# EAGLE board IO_adapter_display (EAGLE 7.7.0)
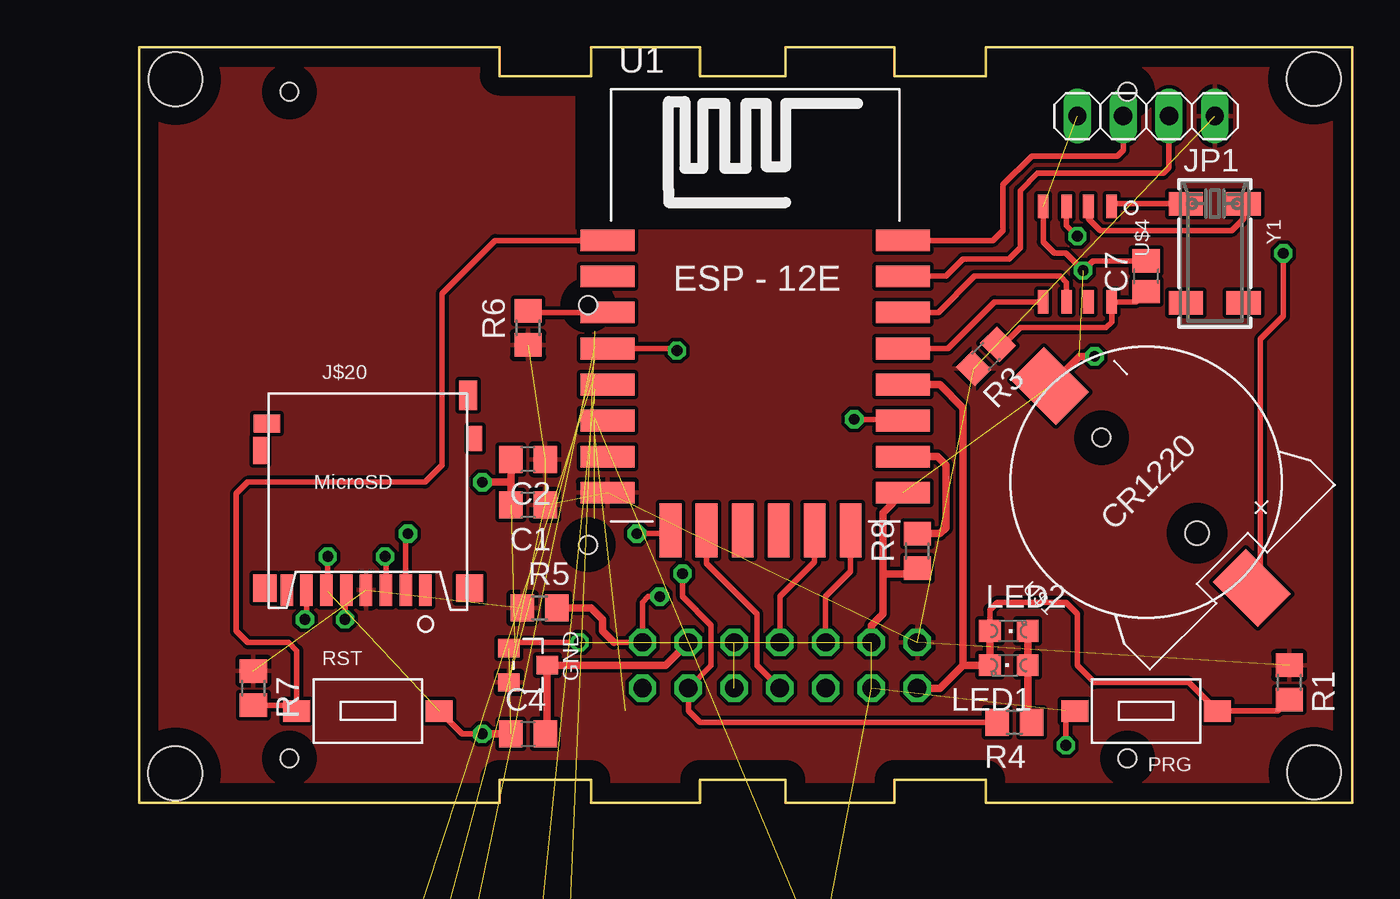
[diagram p0: board, top side]
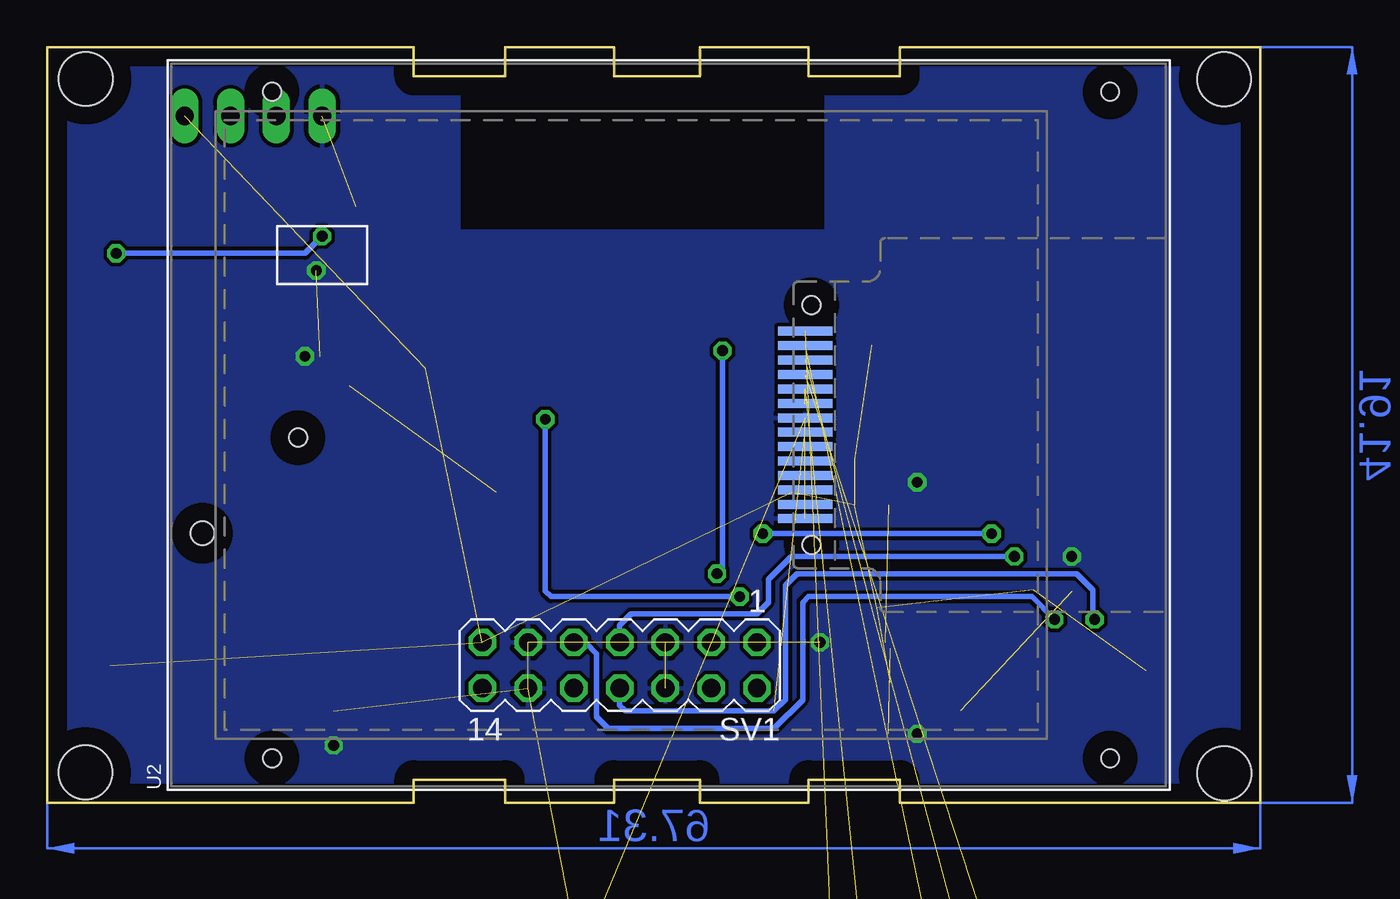
[diagram p1: board, bottom side, seen from below]

Size 67.31 x 41.91 mm. Coordinates in mm from the lower left corner, seen from the top.
Outline: 0,41.91 20,41.91 20,40.32 25.08,40.32 25.08,41.91 31.11,41.91 31.11,40.32 35.88,40.32 35.88,41.91 41.91,41.91 41.91,40.32 46.99,40.32 46.99,41.91 67.31,41.91 67.31,0 46.99,0 46.99,1.27 41.91,1.27 41.91,0 35.88,0 35.88,1.27 31.11,1.27 31.11,0 25.08,0 25.08,1.27 20,1.27 20,0 0,0 0,41.91
Copper layers (1*16): Top 0.035mm / dielectric 1.5mm / Bottom 0.035mm
Design rules "default": minimum track width 10mil, minimum drill 24mil, track to track 8mil, track to pad 8mil, pad to pad 8mil, via to via 8mil, smd to smd 8mil, copper to edge 40mil, drill to drill 8mil, minimum pad ring 10mil, minimum via ring 8mil, stop-mask expansion 4mil, vias tented up to drill 0mil, thermal gap 10mil
Holes 3 mm at 2.02,40.15 65.19,40.16 65.19,1.67 2,1.63

## Footprints (pad centres in the part's own frame; a part is rotated, then mirrored left to right if it is on the bottom)
C0805 = smd 1.3 x 1.5: 1 -0.95,0; 2 0.95,0
C0805' = smd 1.3 x 1.5: 1 -0.85,0; 2 0.85,0
SOT-23 = smd 1.016 x 1.2: 1 -0.95,-1.06; 2 0.95,-1.06; 3 0,1.06
MICROSD = smd 0.7 x 1.75: P$1 3.2,-0.9; P$2 2.1,-0.9; P$3 1,-0.9; P$4 -0.1,-0.9; P$5 -1.2,-0.9; P$6 -2.3,-0.9; P$7 -3.4,-0.9; P$8 -4.5,-0.9 | smd 1.3 x 1.5: P$9 -5.7,-0.8 | smd 1.5 x 1.5: P$10 5.65,-0.8 | smd 0.8 x 1.5: P$11 -5.95,6.85 | smd 0.8 x 1.4: P$13 5.95,7.5 | smd 1 x 1.65: P$CD1 5.55,9.9 | smd 1.45 x 1: P$CD2 -5.6,8.35
1X04 = drill 1.016 long: 1 -3.81,0; 2 -1.27,0; 3 1.27,0; 4 3.81,0
CHIPLED_0805 = smd 1.2 x 1.2: A 0,-1.05; C 0,1.05
TACT_6X3.5 = smd 1.5 x 1.2: P$1 -3.95,0; P$2 3.95,0
SOT23-WIDE = smd 1 x 1.2: 1 -0.95,-1; 2 0.95,-1; 3 0,1
R0805 = smd 1.3 x 1.5: 1 -0.95,0; 2 0.95,0
_0805MP = smd 1.2 x 1.3: 1 -1.016,0; 2 1.016,0
MA07-2 = drill 1.016 octagon: 1 -7.62,-1.27; 2 -7.62,1.27; 3 -5.08,-1.27; 4 -5.08,1.27; 5 -2.54,-1.27; 6 -2.54,1.27; 7 0,-1.27; 8 0,1.27; 9 2.54,-1.27; 10 2.54,1.27; 11 5.08,-1.27; 12 5.08,1.27; 13 7.62,-1.27; 14 7.62,1.27
ESP12E-SMD = smd 3 x 1.2: ADC -8.3,3.8; CH_PD -8.3,1.8; GND 8.1,-8.2; GPIO0 8.1,-2.2; GPIO2 8.1,-4.2; GPIO4 8.1,-0.2; GPIO5 8.1,1.8; GPIO12 -8.3,-4.2; GPIO13 -8.3,-6.2; GPIO14 -8.3,-2.2; GPIO15 8.1,-6.2; GPIO16 -8.3,-0.2; RESET -8.3,5.8; RXD0 8.1,3.8; TXD0 8.1,5.8; VCC -8.3,-8.2 | smd 1.2 x 3: CS0 -4.8,-10.3; GPIO9 -0.8,-10.3; GPIO10 1.2,-10.3; MISO -2.8,-10.3; MOSI 3.2,-10.3; SCLK 5.2,-10.3
TM022HDH26_2.2IN_LCD = smd 0.5 x 3: 1 -5.2,-9.66; 2 -4.4,-9.66; 3 -3.6,-9.66; 4 -2.8,-9.66; 5 -2,-9.66; 6 -1.2,-9.66; 7 -0.4,-9.66; 8 0.4,-9.66; 9 1.2,-9.66; 10 2,-9.66; 11 2.8,-9.66; 12 3.6,-9.66; 13 4.4,-9.66; 14 5.2,-9.66 | hole 1: -6.65,-10.01; 6.65,-10.01; 18.5,19.92; -18.5,19.92; -18.5,-26.58; 18.5,-26.58
CR1220SMD = smd 3.54 x 2.6: P+ 8.3,0; P- -7.55,0 | hole 1: -3.5,0 | hole 1.3: 4,0
SOIC_8 = smd 1.3 x 0.6: 1 -2.6,1.9; 2 -2.6,0.6; 3 -2.6,-0.6; 4 -2.6,-1.9; 5 2.7,-1.9; 6 2.7,-0.6; 7 2.7,0.6; 8 2.7,1.9
CRYSTAL_8X3.8 = smd 1.3 x 1.9: P$1 -2.75,-1.6; P$2 2.75,-1.6; P$3 2.75,1.6; P$4 -2.75,1.6

## Placement (x,y rotation side)
C1  100u  [C0805]  21.59,16.51 180 top
C2  10u  [C0805]  21.59,19.05 180 top
C4  10nF  [C0805]  21.59,3.81 0 top
C7  10uF  [C0805']  55.88,29.21 90 top
GND  MCP1700SOT23  [SOT-23]  21.59,7.62 270 top
J$20  MICROSD_PUSH/PULL  [MICROSD]  12.7,12.7 0 top
JP1  [1X04]  55.88,38.1 180 top
LED1  [CHIPLED_0805]  48.26,7.62 90 top
LED2  [CHIPLED_0805]  48.26,9.53 270 top
PRG  6X3.5_TACT  [TACT_6X3.5]  55.88,5.08 180 top
Q1  2N2222  [SOT23-WIDE]  36.83,-7.62 0 top  (outside the outline)
R1  10K  [R0805]  63.82,6.67 270 top
R2  10  [_0805MP]  -5.08,-66.04 0 top  (outside the outline)
R3  1K  [R0805]  46.99,24.77 225 top
R4  220  [R0805]  48.58,4.45 180 top
R5  10K  [R0805]  22.23,10.79 0 top
R6  10K  [R0805]  21.59,26.35 90 top
R7  10K  [R0805]  6.35,6.35 270 top
R8  10K  [R0805]  43.18,13.97 90 top
R9  10  [_0805MP]  0,-66.04 0 top  (outside the outline)
R10  10  [_0805MP]  5.08,-66.04 0 top  (outside the outline)
R11  1K  [_0805MP]  10.16,-66.04 0 top  (outside the outline)
R12  10K  [_0805MP]  15.24,-66.04 0 top  (outside the outline)
R13  10  [_0805MP]  20.32,-66.04 0 top  (outside the outline)
RST  6X3.5_TACT  [TACT_6X3.5]  12.7,5.08 0 top
SV1  [MA07-2]  35.56,7.62 180 bottom
U1  [ESP12E-SMD]  34.29,25.4 0 top
U2  [TM022HDH26_2.2IN_LCD]  34.92,20.95 90 bottom
U$1  CR1220SMD  [CR1220SMD]  55.88,17.78 315 top
U$4  PCF8523_RTC  [SOIC_8]  52.07,30.48 270 top
Y1  32Khz  [CRYSTAL_8X3.8]  59.69,30.48 270 top

## Library data of the parts
C1 C2 C4 = eagle-ltspice; SPICEMODEL: NONE; SPICEPREFIX: C
C7 LED1 LED2 = adafruit
GND = MCP1700
J$20 U$4 = IotaWatt_parts
JP1 = pinhead
PRG RST = tactile_switch
Q1 R2 R9-R13 U2 Y1 = microbuilder
R1 R3-R8 = resistor
SV1 = con-lstb; OC_FARNELL: unknown; OC_NEWARK: unknown
U1 = esp8266modules
U$1 = IotaWatt4.8

## Nets
3.3V: R12.2 U2.9 U2.10
3V3: C1.1 C2.1 GND.2 J$20.P$4 JP1.1 R1.1 R3.2 R5.1 R6.1 R7.1 SV1.13 U1.VCC
5V: C4.2 GND.3 SV1.3
ADC: U1.ADC
ADCCS0: R5.2 SV1.1 U1.GPIO2
ADCCS1: LED1.C LED2.A PRG.P$1 R1.2 SV1.14 U1.GPIO0
BACKLIGHT: R11.1 R12.1
CH_PD: R6.2 U1.CH_PD
CSSD: J$20.P$2 U1.CS0
DC_3V: U2.4
GND: C1.2 C2.2 C4.1 C7.2 GND.1 J$20.P$6 JP1.4 PRG.P$2 Q1.2 R8.1 RST.P$2 SV1.5 SV1.6 SV1.11 SV1.12 U1.GND U2.1 U2.8 U$1.P- U$4.4
GPIO9: U1.GPIO9
GPIO10: U1.GPIO10
GPIO12: U1.GPIO12
GPIO13: U1.GPIO13
GPIO14: U1.GPIO14
GPIO15: R8.2 U1.GPIO15
GPIO16: R4.2 SV1.4 U1.GPIO16
LCDCS_3V: U2.5
LEDK: Q1.3 R2.1 R9.1 R10.1 R13.1
MISO: J$20.P$7 SV1.8 U1.MISO U2.7
MOSI: J$20.P$3 SV1.7 U1.MOSI
MOSI_3V: U2.6
N$1: C7.1 R3.1 U$4.8
N$2: R2.2 U2.11
N$3: R9.2 U2.12
N$4: R10.2 U2.13
N$5: Q1.1 R11.2
N$6: R13.2 U2.14
N$8: LED1.A LED2.C R4.1
N$44: U$4.2 Y1.P$4
N$45: U$4.1 Y1.P$1
RESET_3V: U2.2
RST: R7.2 RST.P$1 U1.RESET
RXD: JP1.2 U1.RXD0
SCL: U1.GPIO5 U$4.6
SCLK: J$20.P$5 SV1.9 U1.SCLK
SCLK_3V: U2.3
SDA: U1.GPIO4 U$4.5
TXD: JP1.3 U1.TXD0
VBATT: U$1.P+ U$4.3

## Tracks (layer width: path | path; a pad name or v marks a point on that pad's centre or on a via)
3.3V  (2 unrouted)
3V3  (11 unrouted)
  pour Top: 0,41.91 24.13,41.91 24.13,31.75 44.45,31.75 44.45,41.91 67.31,41.91 67.31,0 0,0
5V
  Top 0.406: SV1.3 29.21,7.62 GND.3 22.65,3.92 C4.2
ADCCS0  (via drill 0.6)
  Top 0.305: U1.GPIO2 42.32,21.27 v39.69,21.27 | v28.89,11.43 28.26,11.43 27.94,11.11 SV1.1 26.35,8.89
  Top 0.406: R5.2 25.08,10.79 25.72,10.16 25.72,9.52 26.35,8.89
  Bottom 0.305: v28.89,11.43 39.37,11.43 39.69,11.75 v39.69,21.27
ADCCS1
  Top 0.305: 45.72,12.38 45.72,12.7 | R1.2 63.18,5.08 PRG.P$1 58.24,6.67 53.02,6.67 52.07,7.62 52.07,10.48 51.44,11.11 47.62,11.11 47.21,10.7 LED2.A
  Top 0.406: SV1.14 44.45,6.35 45.72,7.62 | U1.GPIO0 44.43,23.2 45.72,21.91 45.72,12.7 45.72,7.62 | LED2.A LED1.C 45.72,7.62
BACKLIGHT  (1 unrouted)
CH_PD
  Top 0.305: R6.2 21.69,27.2 U1.CH_PD
CSSD  (via drill 0.6)
  Top 0.305: U1.CS0 29.31,14.92 v27.62,14.92 | J$20.P$2 14.8,14.8 v14.92,14.92
  Bottom 0.305: v27.62,14.92 v14.92,14.92
GND  (via drill 0.6)  (14 unrouted)
  Top 0.305: J$20.P$6 10.48,11.72 v10.48,13.65 | RST.P$2 17.92,3.81 v19.05,3.81 | PRG.P$2 51.44,5.08 v51.44,3.17 | U$4.4 50.17,31.11 50.8,30.48 51.44,30.48 v52.39,29.53 52.92,30.06 C7.2 | v24.45,8.89 20.85,8.89 GND.1
  Top 0.406: U1.GND 41.27,16.09 41.27,12.7 | 41.27,12.7 41.27,10.48 40.64,9.84 SV1.11 | R8.1 42.86,12.7 41.27,12.7 | C4.1 v19.05,3.81 | C1.2 20.64,17.78 | 20.64,17.78 C2.2 | v19.05,17.78 20.64,17.78 | U$1.P- 52.19,24.77 v53.02,24.77
  pour Bottom: 0,41.91 24.13,41.91 24.13,31.75 44.45,31.75 44.45,41.91 67.31,41.91 67.31,0 0,0
GPIO15
  Top 0.406: U1.GPIO15 44.3,19.2 44.77,18.73 44.77,15.24 44.45,14.92 R8.2
GPIO16  (via drill 0.6)
  Top 0.305: R4.2 31.11,4.45 30.48,5.08 SV1.4 31.75,7.62 31.75,9.84 30.16,11.43 v30.16,12.7 | v29.84,25.08 29.73,25.2 U1.GPIO16
  Bottom 0.305: v30.16,12.7 29.84,13.02 v29.84,25.08
LEDK  (4 unrouted)
MISO  (via drill 0.6)  (1 unrouted)
  Top 0.305: SV1.8 34.29,7.62 34.29,10.48 31.49,13.28 U1.MISO | 9.21,11.71 J$20.P$7 9.3,10.25 v9.21,10.16
  Bottom 0.305: SV1.8 35.56,5.4 35.24,5.08 26.99,5.08 26.35,5.71 26.35,12.06 25.72,12.7 10.2,12.7 J$20.P$7 9.3,10.25 v9.21,10.16
MOSI  (via drill 0.6)
  Top 0.305: U1.MOSI 37.49,13.36 35.56,11.43 SV1.7 | 13.65,11.75 J$20.P$3 13.7,13.61 v13.65,13.65
  Bottom 0.305: SV1.7 35.56,9.84 34.92,10.48 27.94,10.48 27.3,11.11 27.3,12.38 26.04,13.65 v13.65,13.65
N$1
  Top 0.305: C7.1 55.3,27.78 U$4.8 53.97,26.66 53.66,26.35 48.9,26.35 47.98,25.44 R3.1
N$2  (1 unrouted)
N$3  (1 unrouted)
N$4  (1 unrouted)
N$5  (1 unrouted)
N$6  (1 unrouted)
N$8
  Top 0.406: LED2.C LED1.A 49.31,4.86 R4.1
N$44
  Top 0.305: U$4.2 52.67,32.42 53.34,31.75 60.64,31.75 61.29,32.4 Y1.P$4
N$45
  Top 0.305: U$4.1 54.12,33.23 Y1.P$1
RST
  Top 0.305: U1.RESET 19.77,31.2 16.83,28.26 16.83,18.73 15.88,17.78 6.03,17.78 5.4,17.14 5.4,9.53 6.03,8.89 8.29,8.89 8.75,8.43 RST.P$1 8.43,5.4 R7.2
RXD
  Top 0.305: JP1.2 57.15,37.47 57.15,36.83 57.15,35.24 56.83,34.92 49.85,34.92 48.9,33.97 48.9,30.8 48.26,30.16 45.72,30.16 44.77,29.21 U1.RXD0
SCL
  Top 0.305: U1.GPIO5 44.34,27.2 46.35,29.21 51.12,29.21 51.47,28.86 U$4.6
SCLK  (via drill 0.6)
  Top 0.305: U1.SCLK 39.49,12.82 38.1,11.43 SV1.9 | J$20.P$5 11.43,11.73 v11.43,10.16
  Bottom 0.305: SV1.9 37.47,8.89 36.83,8.26 36.83,4.76 36.2,4.13 26.99,4.13 25.4,5.71 25.4,11.11 25.08,11.43 12.7,11.43 v11.43,10.16
SDA
  Top 0.305: U1.GPIO4 44.88,25.2 47.47,27.78 U$4.5
TXD
  Top 0.305: U1.TXD0 47.39,31.2 47.94,31.75 47.94,34.29 49.53,35.88 54.29,35.88 54.61,36.2 JP1.3
VBATT  (via drill 0.6)
  Top 0.305: U$4.3 51.47,32.03 v52.07,31.43 | v63.5,30.48 63.5,26.99 62.23,25.72 62.23,13.03 U$1.P+
  Bottom 0.305: v52.07,31.43 53.02,30.48 v63.5,30.48
(copper drawn outside any net)
  shapes: Bottom area x2